# Altium PCB Sampler_DIOT.PCBDOC (part 10 of 10)
Units mm, origin at the board's own origin, x right, y up, seen from the top; angles counter-clockwise.
Board outline 222.9 x 100 mm, 4 copper layers (L1, P2, L3, L4), stack 1.6 mm thick; 697 components, 418 nets, 2175 pads, 1124 vias.
Unrouted connection lines stored in the file: 6.
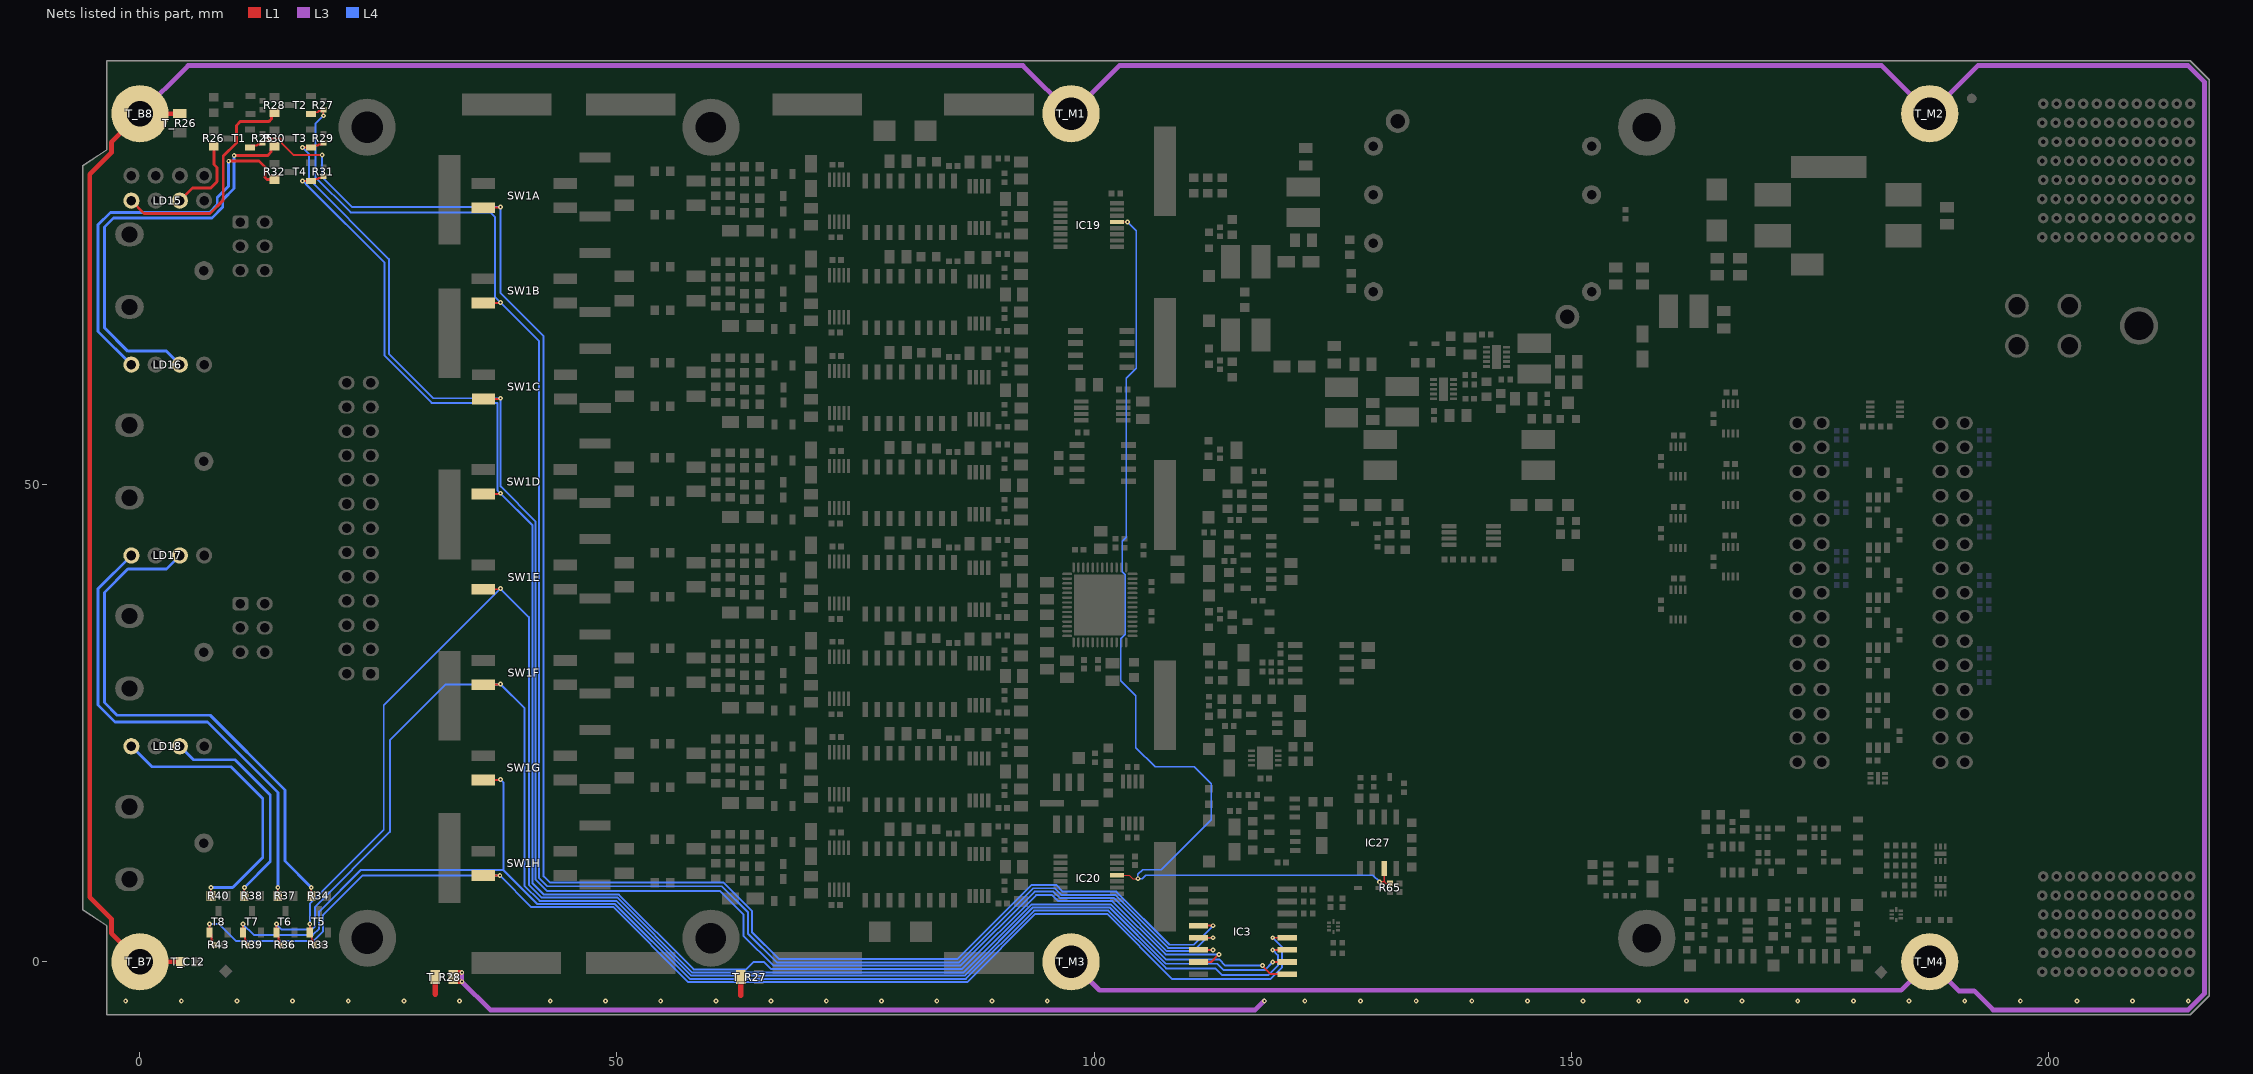
[diagram p10: the nets of this part, all layers, seen from the top]

## Via types
v1: diameter 0.5, hole 0.2, L1 to L4, tented both sides, 1103 vias
v2: diameter 1, hole 0.6, L1 to L4, tented both sides, 15 vias
v3: diameter 0.6, hole 0.3, L1 to L4, tented both sides, 6 vias

## Nets (pads, with @x,y where several pads share a name; then routed paths per layer and width w, separated by ;. In a path a pad name is that pad's centre, name@x,y a point inside that pad or via, vN(x,y) a via of type N, cw(c..) or ccw(c..) an arc to the next point about the centre after c; other vN are vias at no path point) (continued)
SR_O\E\: IC19.13 IC20.13 IC27.7 R65.1 | length 112.6
  L1 w0.127: IC20.13@102.399,9.087 103.706,9.087 104.076,8.717 v1(104.598,8.717) ; IC19.13@102.399,77.55 v1(103.501,77.55)
  L1 w0.152: v1(129.926,8.379) 130.421,8.379 ; IC27.7@130.421,9.792 130.421,8.379 ; R65.1@131.036,8.212 131.024,8.2 130.6,8.2 130.421,8.379
  L4 w0.152: v1(103.501,77.55) 104.442,76.609 104.442,62.233 103.365,61.156 103.365,44.483 102.975,44.093 102.975,40.875 103.275,40.575 103.275,34.325 102.79,33.84 102.79,29.478 104.4,27.868 104.4,22.44 106.411,20.429 110.493,20.429 112.275,18.647 112.275,14.9 107.05,9.675 105.1,9.675 104.6,9.175 104.6,8.719 v1(104.598,8.717) ; v1@104.601,8.714 105.045,8.714 105.417,9.085 129.22,9.085 v1(129.926,8.379)
STRIP1: T_B7.1 T_B8.1 T_C12.2 T_M1.1 T_M2.1 T_M3.1 T_M4.1 T_R26.1 T_R28.2 | length 550.9
  L1 w0.5: T_R26.1@4.152,88.9 T_B8.1@0,88.9 -2.996,85.904 -2.996,84.829 -5.267,82.558 -5.267,6.792 -2.996,4.521 -2.996,2.996 T_B7.1@0,0 T_C12.2@4.25,0
  L1 w0.6: 30.949,-3.382 T_R28.2@30.949,-1.354
  L3 w0.5: T_B8.1@0,88.9 5.046,93.946 92.554,93.946 T_M1.1@97.6,88.9 102.646,93.946 182.554,93.946 T_M2.1@187.6,88.9 192.646,93.946 214.691,93.946 216.396,92.241 216.396,-3.341 214.691,-5.046 194.246,-5.046 192.25,-3.05 190.65,-3.05 T_M4.1@187.6,0 184.625,-2.975 100.575,-2.975 T_M3.1@97.6,0
  other v1: -1.5,-4.1 4.333,-4.1 10.167,-4.1 16,-4.1 21.833,-4.1 27.667,-4.1 33.5,-4.1
STRIP2: T_R27.1 | length 1.9
  L1 w0.6: 62.964,-3.505 T_R27.1@62.964,-1.604
  other v1: 43,-4.1 48.789,-4.1 54.578,-4.1 60.367,-4.1 66.156,-4.1 71.944,-4.1 77.733,-4.1 83.522,-4.1 89.311,-4.1 95.1,-4.1
STRIP3: T_R28.1 | length 88.4
  L1 w0.5: T_R28.1@32.882,-2.079 v1(33.738,-2.079) ; T_R28.1@32.882,-1.128 v1(33.738,-1.128)
  L3 w0.5: v1(33.738,-1.128) v1(33.738,-2.079) 36.705,-5.046 116.91,-5.046 v1(117.856,-4.1)
  other v1: 122.1,-4.1 127.933,-4.1 133.767,-4.1 139.6,-4.1 145.433,-4.1 151.267,-4.1 157.1,-4.1 162.1,-4.1 167.933,-4.1 173.767,-4.1 179.6,-4.1 185.433,-4.1 191.267,-4.1 197.1,-4.1 203.033,-4.1 208.867,-4.1 214.7,-4.1
TERM_IND0: IC3.4 R25.2 SW1A.2 T1.1 | length 188.2
  L1 w0.203: T1.1@11.55,85.351 11.752,85.553 12.223,85.553 12.35,85.681 12.675,85.681 R25.2@12.825,85.831 ; R25.2@12.85,85.831 13.038,86.02 13.27,86.02 13.551,86.301 14.699,86.301 14.864,86.136 14.864,85.786 16.075,84.575 19.092,84.575 v1(19.096,84.579) ; SW1A.2@35.986,79.05 37.716,79.05 v1(37.786,79.12) ; IC3.4@110.955,3.791 IC3.4@110.963,3.783 ; IC3.4@110.963,3.791 v1@112.467,3.791 ; v1@112.467,3.795 v1@112.475,3.787
  L4 w0.203: v1(19.096,84.579) 19.096,82.257 22.222,79.13 37.776,79.13 v1(37.786,79.12) 37.786,70.113 42.319,65.58 42.319,8.956 42.949,8.326 50.722,8.326 61.158,8.326 64.141,5.344 64.141,3.125 66.965,0.302 85.712,0.302 93.48,8.069 96.04,8.069 96.746,7.362 102.342,7.362 107.914,1.79 110.474,1.79 v1(112.475,3.791)
TERM_IND1: IC3.5 R27.2 SW1B.2 T2.1 | length 185.9
  L1 w0.152: v1(19.225,88.681) R27.2@19.225,89.332
  L1 w0.203: T2.1@17.95,88.852 18.152,89.054 18.623,89.054 18.75,89.182 19.075,89.182 R27.2@19.225,89.332 ; SW1B.2@35.986,69.05 37.716,69.05 v1(37.786,69.12) ; IC3.5@110.955,2.521 IC3.5@110.97,2.535 ; IC3.5@110.963,2.521 v1@112.467,2.521 ; v1@112.467,2.525 v1@112.475,2.517
  L4 w0.203: v1(19.225,88.681) 18.375,87.831 18.375,82.26 22.085,78.55 36.699,78.55 37.225,78.024 37.225,69.681 v1(37.786,69.12) 41.844,65.062 41.844,8.781 42.707,7.918 60.989,7.918 63.733,5.175 63.733,2.956 66.747,-0.058 85.861,-0.058 93.629,7.709 95.891,7.709 96.574,7.025 102.202,7.025 107.774,1.453 110.749,1.453 111.816,2.521 v1(112.475,2.521)
TERM_IND2: IC3.6 R29.2 SW1C.2 T3.1 | length 178.6
  L1 w0.203: v1(17.045,85.351) T3.1@17.95,85.351 18.152,85.553 18.623,85.553 18.75,85.681 19.075,85.681 R29.2@19.225,85.831 ; SW1C.2@35.999,59.006 37.729,59.006 v1(37.799,59.076) ; IC3.6@110.955,1.251 v1(112.475,1.252)
  L4 w0.203: v1(17.045,85.351) 17.725,84.671 17.725,82.032 26.1,73.657 26.1,63.729 30.753,59.076 v1(37.799,59.076) 37.799,49.825 41.474,46.15 41.474,8.6 42.639,7.436 50.353,7.436 60.789,7.436 63.25,4.975 63.25,2.756 66.411,-0.404 86.004,-0.404 93.772,7.363 95.748,7.363 96.416,6.695 102.065,6.695 107.638,1.123 111.048,1.123 111.177,1.252 v1(112.475,1.252)
TERM_IND3: IC3.7 R31.2 SW1D.2 T4.1 | length 176.6
  L1 w0.203: v1(17.045,81.85) T4.1@17.95,81.85 18.152,82.052 18.623,82.052 18.75,82.18 19.075,82.18 R31.2@19.225,82.33 ; SW1D.2@35.986,49.05 37.716,49.05 v1(37.786,49.12) ; IC3.7@110.963,-0.019 112.299,-0.019 v1(113.091,0.773)
  L4 w0.203: v1(17.045,81.85) 17.627,81.268 25.634,73.26 25.634,63.537 30.573,58.597 37.468,58.597 37.468,49.437 37.716,49.19 37.716,49.05 v1(37.786,49.12) 41.144,45.762 41.144,8.255 42.348,7.051 50.193,7.051 58.04,-0.796 63.529,-0.796 64.325,0 65.4,0 66.165,-0.765 86.154,-0.765 93.921,7.002 95.598,7.002 96.24,6.36 101.927,6.36 107.514,0.773 v1(113.091,0.773)
TERM_IND4: IC3.9 R33.2 SW1E.2 T5.1 | length 169.2
  L1 w0.203: v1(17.8,3.955) T5.1@17.8,3.05 18.002,2.848 18.002,2.377 18.13,2.25 18.13,1.925 R33.2@18.28,1.775 ; SW1E.2@35.986,39.05 37.716,39.05 v1(37.786,39.12) ; v1(117.65,-0.396) 118.543,-1.289 IC3.9@120.255,-1.289
  L4 w0.203: v1(17.8,3.955) 17.8,6.09 25.55,13.841 25.55,26.884 v1(37.786,39.12) 40.769,36.137 40.769,26.604 40.774,26.599 40.774,16.325 40.769,16.32 40.769,8.056 42.104,6.721 50.057,6.721 57.903,-1.126 86.304,-1.126 93.459,6.03 101.771,6.03 107.545,0.256 113.121,0.256 113.773,-0.396 v1(117.65,-0.396)
TERM_IND5: IC3.10 R36.2 SW1F.2 T6.1 | length 157.5
  L1 w0.203: v1(14.3,3.955) T6.1@14.3,3.05 14.502,2.848 14.502,2.377 14.63,2.25 14.63,1.925 R36.2@14.78,1.775 ; SW1F.2@35.986,29.05 37.716,29.05 v1(37.786,29.12) ; v1@118.735,-0.023 v1@118.743,-0.015 ; v1@118.743,-0.019 IC3.10@120.247,-0.019 ; IC3.10@119.992,0.118 IC3.10@120.017,0.093
  L4 w0.203: v1(14.3,3.955) 14.88,3.375 18.025,3.375 18.324,3.674 18.324,5.743 26.2,13.619 26.2,23.2 32.07,29.07 37.736,29.07 v1(37.786,29.12) 40.286,26.62 40.286,7.988 41.884,6.39 49.92,6.39 57.767,-1.456 86.44,-1.456 93.59,5.693 101.64,5.693 107.539,-0.205 112.93,-0.205 113.6,-0.875 117.879,-0.875 v1(118.735,-0.019)
TERM_IND6: IC3.11 R39.2 SW1G.2 T7.1 | length 140.9
  L1 w0.203: v1(10.796,3.955) T7.1@10.796,3.05 10.998,2.848 10.998,2.377 11.126,2.25 11.126,1.925 R39.2@11.276,1.775 ; SW1G.2@35.986,19.05 37.716,19.05 v1(37.786,19.12) ; v1@118.735,1.247 v1@118.743,1.255 ; v1@118.743,1.251 IC3.11@120.247,1.251
  L4 w0.203: v1(10.796,3.955) 11.926,2.825 18.125,2.825 18.775,3.475 18.775,5.261 23.139,9.625 38.1,9.625 ; v1(37.786,19.12) 38.1,18.806 38.1,9.625 ; v1(118.735,1.251) 119.275,0.711 119.275,-0.397 118.304,-1.368 113.396,-1.368 112.726,-0.698 107.565,-0.698 101.51,5.357 93.72,5.357 86.577,-1.786 57.63,-1.786 49.783,6.06 41.665,6.06 38.1,9.625
TERM_IND7: IC3.12 R43.2 SW1H.2 T8.1 | length 137.1
  L1 w0.203: v1(7.293,3.955) T8.1@7.293,3.05 7.495,2.848 7.495,2.377 7.623,2.25 7.623,1.925 R43.2@7.773,1.775 ; SW1H.2@35.986,9.05 v1(37.716,9.05) ; v1@118.735,2.517 v1@118.743,2.525 ; v1@118.743,2.521 IC3.12@120.247,2.521 ; IC3.12@120.24,2.535 IC3.12@120.255,2.521
  L4 w0.203: v1(7.293,3.955) 8.295,3.955 10.075,2.175 18.157,2.175 19.2,3.218 19.2,4.919 23.331,9.05 v1(37.716,9.05) 41.037,5.729 49.646,5.729 57.493,-2.118 86.714,-2.118 93.852,5.021 101.378,5.021 108.214,-1.816 118.484,-1.816 119.725,-0.575 119.725,1.531 v1(118.735,2.521)
TS0: LD15.3 R26.1 | length 8.6
  L1 w0.3: LD15.3@4.18,79.786 5.519,81.125 7.425,81.125 8.075,81.775 8.075,83.25 7.75,83.575 R26.1@7.75,85.501
TS1: LD15.1 R28.1 | length 23.9
  L1 w0.3: LD15.1@-0.9,79.786 0.435,78.451 7.351,78.451 8.735,79.835 8.735,84.465 10.1,85.83 10.1,87.673 10.491,88.064 13.489,88.064 13.77,88.345 13.77,88.702 14.07,89.002 R28.1@14.1,89.002
TS2: LD16.3 R30.1 | length 44.1
  L1 w0.3: v1(9.875,84.525) 13.4,84.525 13.75,84.875 13.75,85.201 14.05,85.501 R30.1@14.1,85.501
  L4 w0.3: LD16.3@4.18,62.591 2.764,64.007 -1.275,64.007 -3.727,66.459 -3.727,77.023 -2.771,77.979 7.538,77.979 8.672,79.113 8.672,79.875 9.868,81.07 9.868,84.518 v1(9.875,84.525)
TS3: LD16.1 R32.1 | length 40.8
  L1 w0.3: v1(9.296,83.924) 9.3,83.928 12.472,83.928 13.1,83.3 13.1,82.225 13.325,82 R32.1@14.1,82
  L4 w0.3: LD16.1@-0.9,62.591 -4.385,66.076 -4.385,77.265 -3.099,78.551 7.301,78.551 8.1,79.35 8.1,80.111 9.296,81.307 v1(9.296,83.924)
TS4: LD17.3 R34.1 | length 55.8
  L1 w0.152: R34.1@17.95,7.15 v1(17.95,7.801)
  L4 w0.3: LD17.3@4.18,42.591 2.764,41.175 -1.275,41.175 -3.727,38.723 -3.727,27.172 -2.401,25.847 7.356,25.847 15.2,18.003 15.2,10.551 v1(17.95,7.801)
TS5: LD17.1 R37.1 | length 50.4
  L1 w0.152: R37.1@14.45,7.15 v1(14.45,7.801)
  L4 w0.3: LD17.1@-0.9,42.591 -4.385,39.106 -4.385,26.913 -2.613,25.14 7.064,25.14 14.45,17.753 v1(14.45,7.801)
TS6: LD18.3 R38.1 | length 23
  L1 w0.152: R38.1@10.946,7.15 v1(10.946,7.801)
  L4 w0.3: LD18.3@4.18,22.591 5.596,21.175 9.951,21.175 13.65,17.476 13.65,10.505 v1(10.946,7.801)
TS7: LD18.1 R40.1 | length 29.6
  L1 w0.152: R40.1@7.443,7.15 v1(7.443,7.801)
  L4 w0.3: LD18.1@-0.9,22.591 1.248,20.443 9.53,20.443 12.863,17.11 12.863,10.95 9.715,7.801 v1(7.443,7.801)
pads on no net: FTG1.FTG2 FTG2.1 FTG3.1 FTG4.FTG2 FTG5.1 FTG6.1 IC3.13 IC25.9 IC28.4 IC31.4 M1.MH M2.MH Standoff1.MH Standoff2.MH T_D1.5 T_D2.5 T_D3.5 T_IC1.4 T_IC2.5 T_IC3.7 T_IC4.5 T_IC5.7 T_J4.B1 T_J4.L2 T_J5.A3 T_J5.A5 T_J5.A7 T_J5.A8 T_J5.B2 T_J5.B3 T_J5.B4 T_J5.B5 T_J5.B6 T_J5.B7 T_J5.B8 T_J5.C2 T_J5.C4 T_J5.C6 T_J5.C8 T_J5.D3 T_J5.D5 T_J5.D7 T_J5.D8 T_J5.E2 T_J5.E3 T_J5.E4 T_J5.E5 T_J5.E6 T_J5.E7 T_J5.E8 T_J5.F2 T_J5.F4 T_J5.F6 T_J5.F8 T_J5.G3 T_J5.G5 T_J5.G7 T_J5.H2 T_J5.H3 T_J5.H4 T_J5.H5 T_J5.H6 T_J5.H7 T_J5.H8 T_J5.I2 T_J5.I4 T_J5.I6 T_J5.I8 T_J5.J3 T_J5.J5 T_J5.J7 T_J5.K2 T_J5.K3 T_J5.K4 T_J5.K5 T_J5.K6 T_J5.K7 T_J5.K8 T_J5.L2 T_J5.L4 T_J5.L6 T_J5.L8 T_J6.5

## Polygon pours and split planes (outlines as drawn)
STRIP2 on L1 "STRIP2_L01_P053" (solid, pour order 53): 96.5,-5.55 96.5,-3.15 41.5,-3.15 41.5,-5.55
STRIP3 on L1 "STRIP3_L01_P052" (solid, pour order 52): 214.145,-5.55 216.545,-3.15 116.5,-3.15 116.5,-5.55
STRIP1 on L1 "STRIP1_L01_P051" (solid, remove dead copper, pour order 51): 3,1.7 ccw(c1,1.7) 1,3.7 -3.5,3.7 -3.5,-5.55 36.5,-5.55 36.5,-3.15 3,-3.15
no net on L1 "Balancing_L1" (solid, pour order 80): -6,5.45 -6,83.45 -3.5,85.1 -3.5,94.45 214.9,94.45 216.9,92.45 216.9,-3.55 214.9,-5.55 -3.5,-5.55 -3.5,3.8
P3V3 on L1 "P3V3_L01_P079" (solid, remove dead copper, pour order 79): 160.525,31.875 162.94,31.875 163.575,32.51 163.575,33.725 163.05,34.25 159.151,34.25 157.7,35.701 157.7,39.475 158.085,39.86 161.087,39.86 161.087,40.937 164.54,44.39 166.488,44.39 166.488,45.01 164.235,45.01 161.55,42.325 158.15,42.325 157.7,42.775 157.7,46.725 158.334,47.359 161.087,47.359 161.087,48.387 164.559,51.859 166.588,51.859 166.588,52.479 164.113,52.479 161.409,49.775 158.225,49.775 157.675,50.325 157.675,53.325 159.209,54.859 161.088,54.859 161.088,55.863 164.584,59.359 166.588,59.359 166.588,59.979 166.738,60.129 175.921,60.129 178.825,57.225 178.825,56.367 179.402,55.79 180.91,55.79 180.91,56.41 179.915,56.41 179.575,56.75 179.575,57.525 176.283,60.817 163.742,60.817 155.51,52.585 152.927,52.585 152.167,53.345 151.354,52.532 151.332,52.532 151.332,50.147 154.575,46.903 154.575,34.9 157.6,31.875
P12V0 on L1 "P12V0_L01_P077" (solid, remove dead copper, pour order 77): 190.42,19.595 188.273,19.595 187.675,20.193 187.675,21.7 190.829,24.854 191.795,24.854 192.416,25.475 192.416,38.473 193.55,39.607 193.55,57.8 183.9,67.45 164.801,67.45 164.4,67.049 164.4,63.825 153.625,53.05 152.923,53.05 152.398,53.575 152.375,53.575 162.4,63.6 162.4,69.95 168.3,69.95 168.975,70.625 168.975,72.955 168.73,73.2 164.325,73.2 164.225,73.3 164.225,77.8 167.6,77.8 168.05,77.35 173.05,77.35 173.05,70.9 173.825,70.125 185.875,70.125 195.575,60.425 195.575,24.15 192.825,21.4 192.825,21.22
GND on L1 "GND_L01_P078" (solid, remove dead copper, pour order 78): 180.95,81.525 178.575,79.15 167.833,79.15 167.183,79.8 163.687,79.8 163.35,80.137 163.35,82.35 166.725,85.725 180.275,85.725 180.95,85.05
P6V0A on L1 "P6V0A_L01_P071" (solid, remove dead copper, pour order 71): 128.05,32.475 128.05,33.752 127.78,34.022 127.78,52.524 127.775,52.529 132.475,52.529 132.435,52.489 132.435,47.245 129.62,47.245 129.1,46.725 129.1,42.425 130.219,41.306 130.219,29.944 128.41,28.135 125.892,28.135 125.721,28.306 125.721,29.689 129.246,29.689 129.715,30.157 129.715,32.393 129.63,32.478 129.627,32.475 129.327,32.475
P3V3A on L1 "P3V3A_L01_P070" (solid, remove dead copper, pour order 70): 148.321,52.529 134.071,52.529 134.05,52.55 134.05,42.275 131.6,39.825 131.6,21.3 130.75,20.45 130.781,20.419 130.781,18.641 131,18.422 132.997,18.422 133.6,19.025 133.6,38.978 135.899,41.277 135.899,49.574 136.854,50.529 145.546,50.529 146.25,49.825 146.25,47.367 146.362,47.255 149.055,47.255 149.065,47.245 150.335,47.245 150.335,52.515 150.325,52.525
P3V3 on L1 "P3V3_L01_P066" (solid, remove dead copper, pour order 66): 126.763,1.143 127.782,1.143 128.375,0.55 128.375,-0.45 127.3,-1.525 122.175,-1.525 121.575,-0.925 121.575,0.225 121.8,0.45 126.325,0.45 126.5,0.625 126.5,0.975 126.668,1.143
N13V0 on L1 "N13V0_L01_P062" (solid, remove dead copper, pour order 62): 120.403,20.51 120.403,21.319 120.232,21.489 118.737,21.489 117.676,22.55 117.087,22.55 117.087,23.137 117.4,23.45 120.093,23.45 120.425,23.782 120.425,24.375 120.078,24.722 118.637,24.722 118.637,25.272 119.912,25.272 120,25.36 122.485,25.36 122.875,25.75 122.875,41.225 123.825,41.225 123.825,24.262 123.123,23.56 121.66,23.56 121.353,23.253 121.353,20.51
P3V3_MP on L1 "P3V3_MP_L01_P064" (solid, remove dead copper, pour order 64): 190.428,21.026 190.428,21.453 190.595,21.62 192.48,21.62 192.925,21.175 192.925,18.725 188.375,14.175 184.85,14.175 183.382,12.707 183.382,11.897 182.303,11.897 182.025,12.175 182.025,14.375 183.75,16.1 186.925,16.1 190.42,19.595 190.42,20.92
P3V3_MP on L1 "P3V3_MP_L01_P063" (solid, remove dead copper, pour order 63): 160.14,9.945 160.14,8.61 160.4,8.35 161.875,8.35 162.5,8.975 162.5,9.8 162.355,9.945 160.76,9.945
N12V0A on L1 "N12V0A_L01_P057" (solid, remove dead copper, pour order 57): 117.772,19.51 115.915,19.51 115.45,19.975 115.45,21.275 115.66,21.485 116.862,21.485 116.862,23.3 117.037,23.475 117.037,24.322 115.695,24.322 115.475,24.542 115.475,25 115.15,25.325 114.05,25.325 113.85,25.525 113.85,26.525 112.95,26.525 112.95,24.825 112.6,24.475 111,24.475 109.65,23.125 109.65,20.925 107.975,19.25 107.975,16.5 108.15,16.325 108.9,16.325 109.65,17.075 109.65,18.375 112.93,21.655 114.87,21.655 114.975,21.55 114.975,19.596 115.681,18.89 117.772,18.89
P3V3A on L1 "P3V3A_L01_P061" (solid, remove dead copper, pour order 61): 118.05,42.925 118.05,38.7 118.325,38.425 122.275,38.425 122.675,38.825 122.675,40.15 122.3,40.525 119.95,40.525 119.8,40.675 119.8,42.58 119.455,42.925
P5V0A on L1 "P5V0A_L01_P060" (solid, remove dead copper, pour order 60): 101.739,41.238 101.739,43.692 101.542,43.889 101.542,45.922 101.19,46.275 100.05,46.275 98.31,44.535 98.31,42.887 97.849,42.887 97.561,42.599 97.32,42.599 97.32,44.97 99.525,47.175 102.825,47.175 104.15,45.85 104.15,44.239 103.982,44.071 101.982,44.071 101.948,44.037 101.948,43.869 102.064,43.753 102.069,43.757 102.568,43.757 102.568,43.137 101.989,42.558 101.989,41.214
P12V0A on L1 "P12V0A_L01_P059" (solid, remove dead copper, pour order 59): 114.603,46.168 114.493,46.278 114.493,47.919 113.631,47.919 113.25,48.3 113.25,49.525 113.533,49.808 118.109,49.808 118.109,50.701 117.96,50.85 117.325,50.85 117.11,51.065 117.11,51.815 117,51.925 113.75,51.925 113.51,52.165 113.51,53.05 112.89,53.05 112.89,52.165 112.65,51.925 111.425,51.925 111.2,52.15 111.2,55.575 110.875,55.9 109.625,55.9 109.25,55.525 109.25,50.025 110.425,48.85 112.275,48.85 112.85,48.275 112.85,46.55 113.412,45.988 114.603,45.988
P5V0A on L1 "P5V0A_L01_P058" (solid, remove dead copper, pour order 58): 121.871,33.499 108.924,33.499 108.15,32.725 105.95,32.725 105.269,32.044 105.269,29.78 106.019,29.78 106.019,31.594 106.3,31.875 112.675,31.875 113,31.55 113,30.65 114,30.65 114,31.225 114.275,31.5 116.6,31.5 116.9,31.2 116.9,29.364 117.185,29.079 118.956,29.079 118.956,29.699 117.551,29.699 117.225,30.025 117.225,30.909 117.37,31.054 117.95,31.054 117.95,32.325 118.515,32.89 121.862,32.89 121.871,32.899
P2V5A on L1 "P2V5A_L01_P056" (solid, remove dead copper, pour order 56): 113.65,43.65 113.65,41.842 113.408,41.6 110.775,41.6 110.35,41.175 110.35,40.975 110.155,40.78 108.027,40.78 108.027,37.552 108.025,37.55 112.6,37.55 112.89,37.26 112.89,36.682 113.428,36.682 113.51,36.6 113.65,36.6 113.75,36.5 113.75,36 113.8,35.95 115.3,35.95 115.525,36.175 116.646,36.175 117.546,35.275 122.375,35.275 122.675,35.575 122.675,37.625 122.275,38.025 119.1,38.025 118.375,37.3 117.175,37.3 117.06,37.415 117.06,38.385 116.927,38.518 116.582,38.518 116.45,38.65 116.45,43.075 115.875,43.65 114.65,43.65
NetC52_1 on L1 "Top Overlay-No Net" (solid, remove dead copper, pour order 20): 156.225,64.3 154.2,62.275 151.8,62.275 151.8,64.463 151.8,71.68 161.2,71.68 161.2,64.3
P12V0 on L4 "P12V0_L04_P054" (solid, remove dead copper, pour order 54): 216.9,0.321 216.9,-2.759 192.618,-2.759 192.6,-2.777 192.6,7.233 182.434,17.399 171.927,17.399 170.998,18.328 170.998,23.071 172.148,24.221 191.972,24.221 193.318,22.874 193.318,14.757 194.588,13.487 194.588,3.837 198.104,0.321 200.771,0.321 209.521,0.321
STRIP2 on L4 "STRIP2_L04_P050" (solid, pour order 50): 96.5,-5.55 96.5,-3.15 41.5,-3.15 41.5,-5.55
STRIP3 on L4 "STRIP3_L04_P049" (solid, pour order 49): 214.145,-5.55 216.545,-3.15 116.5,-3.15 116.5,-5.55
STRIP1 on L4 "STRIP1_L04_P048" (solid, pour order 48): 3,1.7 ccw(c1,1.7) 1,3.7 -3.5,3.7 -3.5,-5.55 36.5,-5.55 36.5,-3.15 3,-3.15
no net on L4 "Balancing_L4" (solid, pour order 82): -6,5.45 -6,83.45 -3.5,85.1 -3.5,94.45 214.9,94.45 216.9,92.45 216.9,-3.55 214.9,-5.55 -3.5,-5.55 -3.5,3.8
N12V0A on L4 "N12V0A_L04_P074" (solid, remove dead copper, pour order 74): 89.595,14.465 90.944,7.244 92.362,8.662 99.623,8.662 102.957,11.995 104.645,11.995 109.45,16.8 109.45,17.981 108.806,18.625 108,18.625 103.175,13.8 99.85,13.8 97.312,11.262 96.747,11.262 95.526,12.483 91.576,12.483
P12V0A on L4 "ML1_BAL" (solid, remove dead copper, pour order 31): 68.944,5.13 67.944,5.13 67.444,5.63 67.194,5.88 67.194,7.206 67.194,84.88 67.944,85.63 71.164,88.85 86.324,88.85 87.694,87.48 87.694,84.63 87.694,11.13 87.194,10.63 86.694,10.63 86.303,10.63 84.194,12.739 84.194,83.88 83.944,84.13 83.694,84.38 76.694,84.38 75.194,84.38 74.694,83.88 74.422,83.608 70.944,83.608 70.922,83.608 70.444,83.13 70.444,6.63 68.944,5.13 68.194,5.13
P3V3 on L4 "P3V3_L04_P068" (solid, remove dead copper, pour order 68): 180.25,45.475 182.65,43.075 182.65,39.367 179.975,36.692 179.975,34.05 178.832,32.907 165.043,32.907 163.95,34 161.725,34 160.6,32.875 160.6,24.85 147.325,11.575 131.8,11.575 130.2,9.975 130.2,8.125 130.05,7.975 122.675,7.975 122.125,8.525 105.252,8.525 105.089,8.362 105.089,8.157 105.242,8.004 106.446,8.004 107.55,6.9 119.925,6.9 127.078,-0.253 128.18,-0.253 128.337,-0.096 128.337,1.471 126.705,3.103 126.705,3.544 127.486,4.325 131.15,4.325 132.275,5.45 132.275,8.525 133.125,9.375 148.525,9.375 163.68,24.53 179.583,24.53 180.356,24.53 180.942,25.117 180.942,31.339 184.25,34.647 184.25,44.07 180.695,47.625 180.4,47.625 180.25,47.475 180.25,47.375
P2V5A on L4 "P2V5A_L04_P076" (solid, remove dead copper, pour order 76): 121.113,36.312 121.113,36.848 121.54,37.275 141.475,37.275 148.25,44.05 152.354,44.05 152.402,44.002 151.876,43.476 148.84,43.476 141.189,35.825 121.6,35.825
P3V3 on L4 "P3V3_L04_P075" (solid, remove dead copper, pour order 75): 152.3,50.225 153.02,50.225 153.55,50.755 153.55,51.9 153.375,52.075 152.803,52.075 151.628,50.9 142.9,50.9 141.55,49.55 124.604,49.55 121.604,52.55 110.05,52.55 106.044,56.556 106.044,78.664 103.833,80.875 103.106,80.875 103.062,80.831 103.062,80.345 104.775,78.632 104.775,62.075 103.65,60.95 103.65,57.162 109.462,51.35 120.989,51.35 124.496,47.843 132.794,47.843 133.851,48.9 142.55,48.9 143.875,50.225
P12V0A on L4 "P12V0A_L04_P073" (solid, remove dead copper, pour order 73): 87.694,87.48 88.924,86.25 90.625,86.25 93.75,83.125 105.975,83.125 109.075,80.025 109.075,57.875 111.2,55.75 111.2,53 110.1,53 106.294,56.806 106.294,78.881 104.175,81 93.975,81 90.924,84.051 89.775,84.051 87.619,81.894 87.1,82.413 87.1,85.375
P3V3_MP on L4 "P3V3_MP_L04_P072" (solid, remove dead copper, pour order 72): 160.599,8.551 160.599,9.624 163.4,12.425 164.075,12.425 164.325,12.175 164.325,8.975 167.35,5.95 174.275,5.95 175.281,6.956 175.281,8.368 175.781,8.368 175.781,6.969 176.825,5.925 177.925,5.925 182.075,10.075 182.075,13.75 182.65,14.325 183.875,14.325 184.25,13.95 184.25,7.6 180.45,3.8 165.35,3.8
P12V0 on L4 "P12V0_L04_P069" (solid, remove dead copper, pour order 69): 175.175,24.221 163.971,24.221 148.725,8.975 132.925,8.975 132.424,8.474 132.424,7.375 149.375,7.375 159.399,17.399 175.175,17.399
P3V3 on L4 "P3V3_L04_P067" (solid, remove dead copper, pour order 67): 123.15,-2.735 123.15,-0.25 122.5,0.4 121.75,0.4 119.085,-2.265 119.085,-2.735
P3V3A on L4 "P3V3A_L04_P065" (solid, remove dead copper, pour order 65): 131.375,38.425 132,37.8 133.35,37.8 133.6,38.05 133.6,39.825 133.275,40.15 120.4,40.15 119.896,39.646 119.896,38.804 120.275,38.425
N12V0A on L4 "ML1_BAL" (solid, remove dead copper, pour order 4): 64.962,84.398 64.962,4.362 67.924,1.4 84.675,1.4 84.675,4.88 74.244,4.88 67.87,4.88 66.944,5.806 66.944,14.13 66.944,84.38 66.694,84.63 65.194,84.63
GND on L4 "GND_L04_P055" (solid, remove dead copper, pour order 55): 202.9,46.2 202.9,42.7 216.469,42.7 216.469,46.2
N12V0A on L4 "ML1_BAL" (solid, remove dead copper, pour order 32): 89.444,77.38 89.809,77.38 90.944,76.245 90.944,7.244 85.1,1.4 84.225,1.4 84.225,4.9 88.269,8.944 88.269,77.205 88.444,77.38
GND on L3 "L3-GND" (solid, remove dead copper, pour order 43): -6.042,94.45 216.122,94.45 216.122,-2.994 100.369,-2.994 100.369,-3.025 -5.671,-3.025
no net on L3 "Balancing_L3" (solid, pour order 81): -6,5.45 -6,83.45 -3.5,85.1 -3.5,94.45 214.9,94.45 216.9,92.45 216.9,-3.55 214.9,-5.55 -3.5,-5.55 -3.5,3.8
GND on P2 (split plane): 216.39,92.239 216.39,-3.339 214.689,-5.04 118.625,-5.04 118.625,-3.05 118.616,-3.001 118.588,-2.96 118.547,-2.932 118.498,-2.923 40.801,-2.923 38.588,-0.71 38.547,-0.682 38.498,-0.673 36.498,-0.673 36.449,-0.682 36.408,-0.71 36.38,-0.751 36.371,-0.8 36.371,-5.04 -2.99,-5.04 -2.99,3.8 -2.99,3.801 -2.99,3.803 -2.995,3.851 -2.999,3.9 -3,3.901 -3,3.902 -3.014,3.949 -3.028,3.995 -3.029,3.997 -3.03,3.998 -3.053,4.041 -3.076,4.084 -3.076,4.085 -3.077,4.086 -3.108,4.123 -3.139,4.161 -3.14,4.162 -3.141,4.163 -3.179,4.193 -3.216,4.224 -3.218,4.225 -3.219,4.226 -5.49,5.725 -5.49,83.175 -3.219,84.674 -3.218,84.675 -3.216,84.676 -3.179,84.707 -3.141,84.737 -3.14,84.738 -3.139,84.739 -3.108,84.777 -3.077,84.814 -3.076,84.815 -3.076,84.816 -3.053,84.859 -3.03,84.902 -3.029,84.903 -3.028,84.905 -3.014,84.951 -3,84.998 -3,84.999 -2.999,85 -2.995,85.049 -2.99,85.097 -2.99,85.099 -2.99,85.1 -2.99,93.94 115.308,93.94 115.308,62.692 125.479,52.521 151.336,52.521 162.405,63.589 162.405,66.15 161.205,66.15 161.205,63.639 151.286,53.721 126.029,53.721 116.508,63.242 116.508,93.94 214.689,93.94
GND on P2 (split plane): 40.658,-3.14 40.686,-3.159 40.699,-3.168 40.748,-3.177 118.371,-3.177 118.371,-5.04 36.625,-5.04 36.625,-0.927 38.445,-0.927

## Keep-outs
L1:
  region: 214.9,-5.55 -3.5,-5.55 -3.5,-3.05 216.9,-3.05 216.9,-3.55
  region: 214.9,94.45 -3.5,94.45 -3.5,91.95 216.9,91.95 216.9,92.45
  lines w0.1: 165.603,47.274 167.625,47.275 ; 165.603,54.774 169.364,54.774 ; 193.35,20.825 193.35,18.625 191.325,16.6 191.325,12.25 193.875,9.7 ; 196.334,9.478 196.334,21.294 196.989,21.949 196.989,37.225 ; 201.525,29.7 201.525,28.4 205.025,24.9 205.025,11.875 203.725,10.575
L4:
  region: 214.9,-5.55 -3.5,-5.55 -3.5,-3.05 216.9,-3.05 216.9,-3.55
  region: 214.9,94.45 -3.5,94.45 -3.5,91.95 216.9,91.95 216.9,92.45
  region: 6.7,-3.5 -3.3,-3.5 -3.3,3.5 6.7,3.5
  region: 6.7,85.4 -3.3,85.4 -3.3,92.4 6.7,92.4
  lines w0.1: 130.427,40.497 133.434,40.497 133.913,40.018 133.913,38.389 134.552,37.75 141.175,37.75 144.275,40.85 ; 194.675,36.825 197.625,36.825 200.4,34.05
KeepOutLayer:
  lines w0.254: -6,194.45 94,294.45 194,194.45 218,218.45 142,294.45 42,194.45 ; 218,194.45 118,294.45 18,194.45 ; 218,294.45 118,194.45 18,294.45 -6,270.45 ; -6,196.45 -4,194.45 ; -6,196.45 -4,194.45 ; -6,196.45 92,294.45 192,194.45 218,220.45 144,294.45 44,194.45 ; -6,198.45 -2,194.45 ; -6,198.45 -2,194.45 ; -6,198.45 90,294.45 190,194.45 218,222.45 146,294.45 46,194.45 ; -6,200.45 0,194.45 ; -6,200.45 0,194.45 ; -6,200.45 88,294.45 188,194.45 218,224.45 148,294.45 48,194.45 ; -6,202.45 2,194.45 ; -6,202.45 2,194.45 ; -6,202.45 86,294.45 186,194.45 218,226.45 150,294.45 50,194.45 ; -6,204.45 4,194.45 ; -6,204.45 4,194.45 ; -6,204.45 84,294.45 184,194.45 218,228.45 152,294.45 52,194.45 ; -6,206.45 6,194.45 ; -6,206.45 6,194.45 ; -6,206.45 82,294.45 182,194.45 218,230.45 154,294.45 54,194.45 ; -6,208.45 8,194.45 ; -6,208.45 8,194.45 ; -6,208.45 80,294.45 180,194.45 218,232.45 156,294.45 56,194.45 ; -6,210.45 10,194.45 ; -6,210.45 10,194.45 ; -6,210.45 78,294.45 178,194.45 218,234.45 158,294.45 58,194.45 ; -6,212.45 12,194.45 ; -6,212.45 12,194.45 ; -6,212.45 76,294.45 176,194.45 218,236.45 160,294.45 60,194.45 ; -6,214.45 14,194.45 ; -6,214.45 14,194.45 ; -6,214.45 74,294.45 174,194.45 218,238.45 162,294.45 62,194.45 ; -6,216.45 16,194.45 ; -6,216.45 16,194.45 ; -6,216.45 72,294.45 172,194.45 218,240.45 164,294.45 64,194.45 ; -6,218.45 18,194.45 ; -6,218.45 18,194.45 ; -6,218.45 70,294.45 170,194.45 218,242.45 166,294.45 66,194.45 ; -6,220.45 20,194.45 ; -6,220.45 20,194.45 ; -6,220.45 68,294.45 168,194.45 218,244.45 168,294.45 68,194.45 ; -6,222.45 22,194.45 ; -6,222.45 22,194.45 ; -6,222.45 66,294.45 166,194.45 218,246.45 170,294.45 70,194.45 ; -6,224.45 24,194.45 ; -6,224.45 24,194.45 ; -6,224.45 64,294.45 164,194.45 218,248.45 172,294.45 72,194.45 ; -6,226.45 26,194.45 ; -6,226.45 26,194.45 ; -6,226.45 62,294.45 162,194.45 218,250.45 174,294.45 74,194.45 ; -6,228.45 28,194.45 ; -6,228.45 28,194.45 ; -6,228.45 60,294.45 160,194.45 218,252.45 176,294.45 76,194.45 ; -6,230.45 30,194.45 ; -6,230.45 30,194.45 ; -6,230.45 58,294.45 158,194.45 218,254.45 178,294.45 78,194.45 ; -6,232.45 32,194.45 ; -6,232.45 32,194.45 ; -6,232.45 56,294.45 156,194.45 218,256.45 180,294.45 80,194.45 ; -6,234.45 34,194.45 ; -6,234.45 34,194.45 ; -6,234.45 54,294.45 154,194.45 218,258.45 182,294.45 82,194.45 ; -6,236.45 36,194.45 ; -6,236.45 36,194.45 ; -6,236.45 52,294.45 152,194.45 218,260.45 184,294.45 84,194.45 ; -6,238.45 38,194.45 ; -6,238.45 38,194.45 ; -6,238.45 50,294.45 150,194.45 218,262.45 186,294.45 86,194.45 ; -6,240.45 40,194.45 ; -6,240.45 40,194.45 ; -6,240.45 48,294.45 148,194.45 218,264.45 188,294.45 88,194.45 ; -6,242.45 42,194.45 ; -6,242.45 42,194.45 ; -6,242.45 46,294.45 146,194.45 218,266.45 190,294.45 90,194.45 ; -6,244.45 44,194.45 ; -6,244.45 44,194.45 ; -6,244.45 44,294.45 144,194.45 218,268.45 192,294.45 92,194.45 ; -6,246.45 46,194.45 ; -6,246.45 46,194.45 ; -6,246.45 42,294.45 142,194.45 218,270.45 194,294.45 94,194.45 ; -6,248.45 48,194.45 ; -6,248.45 48,194.45 ; -6,248.45 40,294.45 140,194.45 218,272.45 196,294.45 96,194.45 -4,294.45 -6,292.45 ; -6,250.45 50,194.45 ; -6,250.45 50,194.45 ; -6,250.45 38,294.45 138,194.45 218,274.45 198,294.45 98,194.45 -2,294.45 -6,290.45 ; -6,252.45 52,194.45 ; -6,252.45 52,194.45 ; -6,252.45 36,294.45 136,194.45 218,276.45 200,294.45 100,194.45 0,294.45 -6,288.45 ; -6,254.45 54,194.45 ; -6,254.45 54,194.45 ; -6,254.45 34,294.45 134,194.45 218,278.45 202,294.45 102,194.45 2,294.45 -6,286.45 ; -6,256.45 56,194.45 ; -6,256.45 56,194.45 ; -6,256.45 32,294.45 132,194.45 218,280.45 204,294.45 104,194.45 4,294.45 -6,284.45 ; -6,258.45 58,194.45 ; -6,258.45 58,194.45 ; -6,258.45 30,294.45 130,194.45 218,282.45 206,294.45 106,194.45 6,294.45 -6,282.45 ; -6,260.45 60,194.45 ; -6,260.45 60,194.45 ; -6,260.45 28,294.45 128,194.45 218,284.45 208,294.45 108,194.45 8,294.45 -6,280.45 ; -6,262.45 62,194.45 ; -6,262.45 62,194.45 ; -6,262.45 26,294.45 126,194.45 218,286.45 210,294.45 110,194.45 10,294.45 -6,278.45 ; -6,264.45 64,194.45 ; -6,264.45 64,194.45 ; -6,264.45 24,294.45 124,194.45 218,288.45 212,294.45 112,194.45 12,294.45 -6,276.45 ; -6,266.45 66,194.45 ; -6,266.45 66,194.45 ; -6,266.45 22,294.45 122,194.45 218,290.45 214,294.45 114,194.45 14,294.45 -6,274.45 ; -6,268.45 68,194.45 ; -6,268.45 68,194.45 ; -6,268.45 20,294.45 120,194.45 218,292.45 216,294.45 116,194.45 16,294.45 -6,272.45 ; -6,270.45 70,194.45 ; -6,270.45 70,194.45 ; -6,272.45 72,194.45 ; -6,272.45 72,194.45 ; -6,274.45 74,194.45 ; -6,274.45 74,194.45 ; -6,276.45 76,194.45 ; -6,276.45 76,194.45 ; -6,278.45 78,194.45 ; -6,278.45 78,194.45 ; -6,280.45 80,194.45 ; -6,280.45 80,194.45 ; -6,282.45 82,194.45 ; -6,282.45 82,194.45 ; -6,284.45 84,194.45 ; -6,284.45 84,194.45 ; -6,286.45 86,194.45 ; -6,286.45 86,194.45 ; -6,288.45 88,194.45 ; -6,288.45 88,194.45 ; -6,290.45 90,194.45 ; -6,290.45 90,194.45 ; -6,292.45 92,194.45 ; -6,292.45 92,194.45 ; -4,194.45 96,294.45 196,194.45 218,216.45 140,294.45 40,194.45 ; -2,194.45 98,294.45 198,194.45 218,214.45 138,294.45 38,194.45 ; 0,194.45 100,294.45 200,194.45 218,212.45 136,294.45 36,194.45 ; 2,194.45 102,294.45 202,194.45 218,210.45 134,294.45 34,194.45 ; 4,194.45 104,294.45 204,194.45 218,208.45 132,294.45 32,194.45 ; 6,194.45 106,294.45 206,194.45 218,206.45 130,294.45 30,194.45 ; 8,194.45 108,294.45 208,194.45 218,204.45 128,294.45 28,194.45 ; 10,194.45 110,294.45 210,194.45 218,202.45 126,294.45 26,194.45 ; 12,194.45 112,294.45 212,194.45 218,200.45 124,294.45 24,194.45 ; 14,194.45 114,294.45 214,194.45 218,198.45 122,294.45 22,194.45 ; 16,194.45 116,294.45 216,194.45 218,196.45 120,294.45 20,194.45 ; 94,194.45 -6,294.45 94,194.45

## Other copper
L1:
  rectangle net GND: 202.9,42.7 216.469,46.203
  rectangle net IN_P4: 43.569,42.68 51.769,45.605
  rectangle net IN_P5: 43.569,32.68 51.769,35.605
  rectangle net IN_P3: 43.569,52.68 51.769,55.605
  rectangle net IN_P2: 43.582,62.636 51.782,65.561
  rectangle net NetC52_1: 140.191,63.97 140.475,64.486
  rectangle net GND: 143.916,58.068 144.366,58.558
  rectangle net IN_P1: 43.569,72.72 51.769,75.645
  rectangle net IN_P0: 43.569,82.68 51.769,85.605
  rectangle net P6V0: 135.141,58.87 135.277,59.163
  rectangle net GND: 127.069,61.655 127.53,62.08
  rectangle net P6V0: 135.166,59.87 135.316,60.17
  rectangle net GND: 100.494,45.53 100.919,45.921
  rectangle net P5V0A: 105.269,29.78 106.019,31.155
  rectangle net IN_P7: 43.569,12.68 51.769,15.605
  rectangle net IN_P6: 43.569,22.68 51.769,25.605
  pour cut-out: 96.5,-3.156 96.5,-5.142 116.5,-5.142 116.5,-3.156
  pour cut-out: 36.5,-3.156 36.5,-5.142 41.5,-5.142 41.5,-3.156
  pour cut-out: 151.332,52.532 162.4,63.6 162.4,94.453 161.2,94.453 161.2,63.65 151.282,53.732 126.024,53.732 116.503,63.253 116.503,94.45 115.303,94.45 115.303,62.703 125.474,52.532
L3:
  rectangle net P5V0A: 105.094,29.955 105.844,31.055
  rectangle net GND: 98.013,34.33 103.094,40.619
  pour cut-out: 151.336,52.521 162.405,63.589 162.405,94.442 161.205,94.442 161.205,63.639 151.286,53.721 126.029,53.721 116.508,63.242 116.508,94.45 115.308,94.45 115.308,62.692 125.479,52.521
L4:
  rectangle net N13V0: 117.087,20.17 118.737,22.55
  pour cut-out: 116.5,-3.156 96.5,-3.156 96.5,-5.142 116.5,-5.142
  pour cut-out: 36.5,-3.156 41.5,-3.156 41.5,-5.142 36.5,-5.142
  pour cut-out: 151.333,52.518 162.402,63.586 162.402,94.439 161.202,94.439 161.202,63.636 151.283,53.718 126.026,53.718 116.505,63.239 116.505,94.2 115.305,94.2 115.305,62.689 125.476,52.518
P2 (plane layer: these items are gaps in the copper):
  pour cut-out: 151.336,52.521 162.405,63.589 162.405,66.15 161.205,66.15 161.205,63.639 151.286,53.721 126.029,53.721 116.508,63.242 116.508,94.45 115.308,94.45 115.308,62.692 125.479,52.521
  lines w0.25: 36.498,-5.3 36.498,-0.8 38.498,-0.8 40.748,-3.05 118.498,-3.05 118.498,-5.3

## Silkscreen, mask and mechanical layers (free items; w line width, h text height)
TopOverlay:
  drawing of 267 lines, arcs and shapes, not listed
  text "Termination" at 45.9,85.7 h1.02
  text "off" at 35.632,84.925 h1.02
  text "CH0" at 38.925,84.925 h1.02
  text "on" at 42.957,84.925 h1.02
  text "ADC1" at 3.689,76.122 h1.14
  text "Termination" at 49.8,75.234 h1.02
  text "off" at 35.632,74.914 h1.02
  text "CH1" at 38.925,74.914 h1.02
  text "on" at 42.957,74.914 h1.02
  text "P13V0" at 110.653,71.008 h1.02 r90
  text "Termination" at 49.8,65.186 h1.02
  text "off" at 35.632,64.903 h1.02
  text "CH2" at 38.925,64.903 h1.02
  text "on" at 42.957,64.903 h1.02
  text "N13V0" at 110.653,63.533 h1.02 r90
  text "EEM1" at 170.837,61.919 h1.52
  text "EEM0" at 185.837,61.919 h1.52
  text "Power +12V" at 203.487,59.725 h1.52
  text "P3V3" at 151.125,58.075 h1.02
  text "ADC3" at 3.753,56.121 h1.14
  text "Termination" at 49.8,55.139 h1.02
  text "off" at 35.632,54.893 h1.02
  text "CH3" at 38.925,54.893 h1.02
  text "on" at 42.957,54.893 h1.02
  text "P12V0A" at 110.653,50.125 h1.02 r90
  text "P6V0A" at 133.2,47.4 h1.02
  text "P3V3A" at 151.15,47.4 h1.02
  text "GND" at 110.653,45.225 h1.02 r90
  text "Termination" at 49.8,45.092 h1.02
  text "off" at 35.632,44.882 h1.02
  text "CH4" at 38.925,44.882 h1.02
  text "on" at 42.957,44.882 h1.02
  text "GND" at 151.15,41.12 h1.02
  text "ADC5" at 3.375,36.125 h1.14
  text "Termination" at 49.8,35.045 h1.02
  text "off" at 35.631,34.872 h1.02
  text "CH5" at 38.925,34.872 h1.02
  text "on" at 42.957,34.872 h1.02
  text "P2V5A" at 110.653,34.725 h1.02 r90
  text "P5V0A" at 110.653,28.975 h1.02 r90
  text "Sampler DIOT / v.P_version / WUT ISE .ModifiedDate" at 136.225,26.15 h1.02
  text "Termination" at 49.8,24.997 h1.02
  text "off" at 35.632,24.861 h1.02
  text "CH6" at 38.925,24.861 h1.02
  text "on" at 42.957,24.861 h1.02
  text "REF_P4V096" at 94.625,23.925 h1.02
  text "N12V0A" at 110.653,22.15 h1.02 r90
  text "ADC7" at 3.754,16.122 h1.14
  text "Termination" at 49.8,14.95 h1.02
  text "off" at 35.625,14.85 h1.02
  text "CH7" at 38.925,14.85 h1.02
  text "on" at 42.957,14.85 h1.02
  text "REF_VCC" at 110.568,13.367 h1.02 r90
  text "GND" at 110.653,9.15 h1.02 r90
  text "P3V3_MP2" at 160.286,7.401 h1.02
  text "P3V3_MP" at 169.292,7.401 h1.02
  text "P12V0" at 177.548,7.401 h1.02
  text "Designed by Pawel Kulik" at 35,3.5 h0.6
  text "GND" at 161.028,-2.763 h1.02
  text "GND" at 169.783,-2.763 h1.02
  text "GND" at 178.539,-2.763 h1.02
TopSolder:
  rectangle: 202.9,42.7 216.9,46.203
  rectangle: -3.57,-5.55 216.469,-3.15
BottomSolder:
  rectangle: 202.9,42.7 216.9,46.203
  rectangle: -3.57,-5.55 216.469,-3.15
  rectangle: 98.119,34.355 103.119,40.48
M1 Board Shape:
  the board outline again, w0.05
M2 Old Board Shape:
  lines w0.1: -5.2,3.65 -5.2,83.395 -3.57,85.025 -3.57,94.349 -3.469,94.45 214.469,94.45 216.469,92.45 216.469,-3.55 214.469,-5.55 -3.57,-5.55 -3.57,1.65 -3.57,3.65 -5.2,3.65
M4 Shielding:
  lines w1: 32.444,-0.12 32.444,89.88 107.444,89.88 107.444,-0.12 32.444,-0.12 ; 115.944,53.88 115.944,88.88 155.944,88.88 155.944,53.88 115.944,53.88
Mechanical 6:
  drawing of 361 lines, arcs and shapes, not listed
  text "Layer" at 46.911,143.673 h1.52
  text "Name" at 57.323,143.673 h1.52
  text "Material" at 79.415,143.673 h1.52
  text "Thickness" at 101.253,143.673 h1.52
  text "Constant" at 117.759,143.673 h1.52
  text "Board Layer Stack" at 132.233,143.673 h1.52
  text "TopOverlay" at 57.323,140.625 h1.52
  text "TopSolder" at 57.323,137.577 h1.52
  text "Solder Resist" at 79.415,137.577 h1.52
  text "0,010mm" at 101.253,137.577 h1.52
  text "3.5" at 117.759,137.577 h1.52
  text "1" at 46.911,134.529 h1.52
  text "L1" at 57.323,134.529 h1.52
  text "0,045mm" at 101.253,134.529 h1.52
  text "Dielectric1" at 57.323,131.481 h1.52
  text "FR-4" at 79.415,131.481 h1.52
  text "0,120mm" at 101.253,131.481 h1.52
  text "4.2" at 117.759,131.481 h1.52
  text "2" at 46.911,128.433 h1.52
  text "P2" at 57.323,128.433 h1.52
  text "0,035mm" at 101.253,128.433 h1.52
  text "Dielectric 3" at 57.323,125.385 h1.52
  text "1,200mm" at 101.253,125.385 h1.52
  text "4.2" at 117.759,125.385 h1.52
  text "3" at 46.911,122.337 h1.52
  text "L3" at 57.323,122.337 h1.52
  text "0,035mm" at 101.253,122.337 h1.52
  text "Dielectric2" at 57.323,119.289 h1.52
  text "FR-4" at 79.415,119.289 h1.52
  text "0,120mm" at 101.253,119.289 h1.52
  text "4.2" at 117.759,119.289 h1.52
  text "4" at 46.911,116.241 h1.52
  text "L4" at 57.323,116.241 h1.52
  text "0,045mm" at 101.253,116.241 h1.52
  text "BottomSolder" at 57.323,113.193 h1.52
  text "Solder Resist" at 79.415,113.193 h1.52
  text "0,010mm" at 101.253,113.193 h1.52
  text "3.5" at 117.759,113.193 h1.52
  text "BottomOverlay" at 57.323,110.145 h1.52
  text "Transmission Line Structure Table" at -0.399,-26.724 h2.38
  text "Transmission Line" at 0.111,-32.265 h2.38
  text "Target Impedance" at 71.11,-32.265 h2.38
  text "Trace layer" at 109.545,-32.265 h2.38
  text "Reference layers" at 135.682,-32.265 h2.38
  text "Trace Width" at 174.086,-32.265 h2.38
  text "Gap" at 204.612,-32.265 h2.38
  text "Coated Microstrip" at 0.111,-37.784 h2.38
  text "50" at 84.082,-37.784 h2.38
  text "L1" at 116.749,-37.784 h2.38
  text "L2" at 147.622,-37.784 h2.38
  text "0.298mm" at 176.349,-37.784 h2.38
  text "Edge-Coupled Coated Microstrip" at 0.111,-43.302 h2.38
  text "100" at 83.052,-43.302 h2.38
  text "L1" at 116.749,-43.302 h2.38
  text "L2" at 147.622,-43.302 h2.38
  text "0.127mm" at 176.349,-43.302 h2.38
  text "0.127mm" at 200.392,-43.302 h2.38
  text "Edge-Coupled Coated Microstrip" at 0.111,-48.82 h2.38
  text "100" at 83.052,-48.82 h2.38
  text "L4" at 116.749,-48.82 h2.38
  text "L3" at 147.417,-48.82 h2.38
  text "0.127mm" at 176.349,-48.82 h2.38
  text "0.127mm" at 200.392,-48.82 h2.38
  text "Coated Microstrip" at 0.111,-54.338 h2.38
  text "50" at 84.082,-54.338 h2.38
  text "L4" at 116.749,-54.338 h2.38
  text "L3" at 147.417,-54.338 h2.38
  text "0.298mm" at 176.349,-54.338 h2.38
Top Courtyard:
  lines w0.1: 169.152,17.126 169.152,60.386 179.392,60.386 179.392,17.126 169.152,17.126 ; 187.922,17.1 198.162,17.1 198.162,60.36 187.922,60.36 187.922,17.1
DrillDrawing:
  rectangle: 111.544,60.38 113.444,61.055

## Text inside footprints (layer, text, board x,y; h text height)
J4: Top Assembly "Board Edge" at -5.774,70.14 h1 r90
J5: Top Assembly "Board Edge" at -5.774,50.14 h1 r90
J6: Top Assembly "Board Edge" at -5.774,30.14 h1 r90
J7: Top Assembly "Board Edge" at -5.774,10.14 h1 r90
rT_J1: TopOverlay "30" at 192.578,24.869 h1.02 r270; Top Assembly "30" at 192.667,21.555 h1.02 r270
SW1A: TopOverlay "1" at 34.426,82.819 h1; Top Assembly "1" at 34.427,82.824 h1
SW1B: TopOverlay "1" at 34.426,72.819 h1; Top Assembly "1" at 34.427,72.824 h1
SW1C: TopOverlay "1" at 34.439,62.775 h1; Top Assembly "1" at 34.44,62.78 h1
SW1D: TopOverlay "1" at 34.426,52.819 h1; Top Assembly "1" at 34.427,52.824 h1
SW1E: TopOverlay "1" at 34.426,42.819 h1; Top Assembly "1" at 34.427,42.824 h1
SW1F: TopOverlay "1" at 34.426,32.819 h1; Top Assembly "1" at 34.427,32.824 h1
SW1G: TopOverlay "1" at 34.426,22.819 h1; Top Assembly "1" at 34.427,22.824 h1
SW1H: TopOverlay "1" at 34.426,12.819 h1; Top Assembly "1" at 34.427,12.824 h1
T_J2: TopOverlay "30" at 177.578,24.869 h1.02 r270; Top Assembly "30" at 177.667,21.555 h1.02 r270
T_J4: DrillDrawing "Diam. 0.5mm +/-0.05" at 215.55,12.95 h1 r180; DrillDrawing "PRESS-FIT TECHNOLOGY" at 215.55,11.45 h1 r180; TopOverlay "6" at 194.85,8.6 h1 r90; TopOverlay "5" at 194.85,6.6 h1 r90; TopOverlay "4" at 194.85,4.6 h1 r90; TopOverlay "3" at 194.85,2.6 h1 r90; TopOverlay "2" at 194.85,0.6 h1 r90; TopOverlay "1" at 194.85,-1.4 h1 r90; Top Assembly "6" at 194.85,8.6 h1 r90; Top Assembly "5" at 194.85,6.6 h1 r90; Top Assembly "4" at 194.85,4.6 h1 r90; Top Assembly "3" at 194.85,2.6 h1 r90; Top Assembly "2" at 194.85,0.6 h1 r90; Top Assembly "1" at 194.85,-1.4 h1 r90; Top Assembly "L" at 199.9,-3.25 h1 r90; Top Assembly "K" at 201.3,-3.25 h1 r90; Top Assembly "J" at 202.7,-3.25 h1 r90; Top Assembly "I" at 204.1,-3 h1 r90; Top Assembly "H" at 205.5,-3.25 h1 r90; Top Assembly "G" at 206.9,-3.25 h1 r90; Top Assembly "F" at 208.3,-3.25 h1 r90; Top Assembly "E" at 209.7,-3.25 h1 r90; Top Assembly "D" at 211.1,-3.25 h1 r90; Top Assembly "C" at 212.5,-4.25 h1 r90; Top Assembly "B" at 213.9,-4.25 h1 r90; Top Assembly "A" at 215.3,-4.25 h1 r90; M8 "Edge of Daugher Card" at 217.65,0.725 h0.5 r90; M8 "Top Surface of Mother Board" at 229.15,-0.425 h0.5 r90
T_J5: DrillDrawing "Diam. 0.5mm +/-0.05" at 215.55,93.95 h1 r180; DrillDrawing "PRESS-FIT TECHNOLOGY" at 215.55,92.45 h1 r180; TopOverlay "7" at 194.85,87.6 h1 r90; TopOverlay "8" at 194.85,89.6 h1 r90; TopOverlay "6" at 194.85,85.6 h1 r90; TopOverlay "5" at 194.85,83.6 h1 r90; TopOverlay "4" at 194.85,81.6 h1 r90; TopOverlay "3" at 194.85,79.6 h1 r90; TopOverlay "2" at 194.85,77.6 h1 r90; TopOverlay "1" at 194.85,75.6 h1 r90; TopOverlay "L" at 199.9,72.75 h1 r90; TopOverlay "K" at 201.3,72.75 h1 r90; TopOverlay "J" at 202.7,72.75 h1 r90; TopOverlay "I" at 204.1,72.75 h1 r90; TopOverlay "H" at 205.5,72.75 h1 r90; TopOverlay "G" at 206.9,72.75 h1 r90; TopOverlay "F" at 208.3,72.75 h1 r90; TopOverlay "E" at 209.7,72.75 h1 r90; TopOverlay "D" at 211.1,72.75 h1 r90; TopOverlay "C" at 212.5,72.75 h1 r90; TopOverlay "B" at 213.9,72.75 h1 r90; TopOverlay "A" at 215.3,72.75 h1 r90; Top Assembly "7" at 194.85,87.6 h1 r90; Top Assembly "8" at 194.85,89.6 h1 r90; Top Assembly "6" at 194.85,85.6 h1 r90; Top Assembly "5" at 194.85,83.6 h1 r90; Top Assembly "4" at 194.85,81.6 h1 r90; Top Assembly "3" at 194.85,79.6 h1 r90; Top Assembly "2" at 194.85,77.6 h1 r90; Top Assembly "1" at 194.85,75.6 h1 r90; Top Assembly "L" at 199.9,73.75 h1 r90; Top Assembly "K" at 201.3,73.75 h1 r90; Top Assembly "J" at 202.7,73.75 h1 r90; Top Assembly "I" at 204.1,74 h1 r90; Top Assembly "H" at 205.5,73.75 h1 r90; Top Assembly "G" at 206.9,73.75 h1 r90; Top Assembly "F" at 208.3,73.75 h1 r90; Top Assembly "E" at 209.7,73.75 h1 r90; Top Assembly "D" at 211.1,73.75 h1 r90; Top Assembly "C" at 212.5,72.75 h1 r90; Top Assembly "B" at 213.9,72.75 h1 r90; Top Assembly "A" at 215.3,72.75 h1 r90; M8 "Edge of Daugher Card" at 217.65,79.725 h0.5 r90; M8 "Top Surface of Mother Board" at 229.15,78.575 h0.5 r90
T_J6: TopOverlay "1" at 201.285,71.142 h1.2 r270; Top Assembly "1" at 201.285,71.142 h1.2 r270